# Altium PCB rectnew.PcbDoc
Units mm, origin at the board's own origin, x right, y up, seen from the top; angles counter-clockwise.
Board outline 127 x 101.6 mm, 2 copper layers (Top Layer, Bottom Layer); 9 components, 6 nets, 21 pads, 0 vias.
Unrouted connection lines stored in the file: 1.
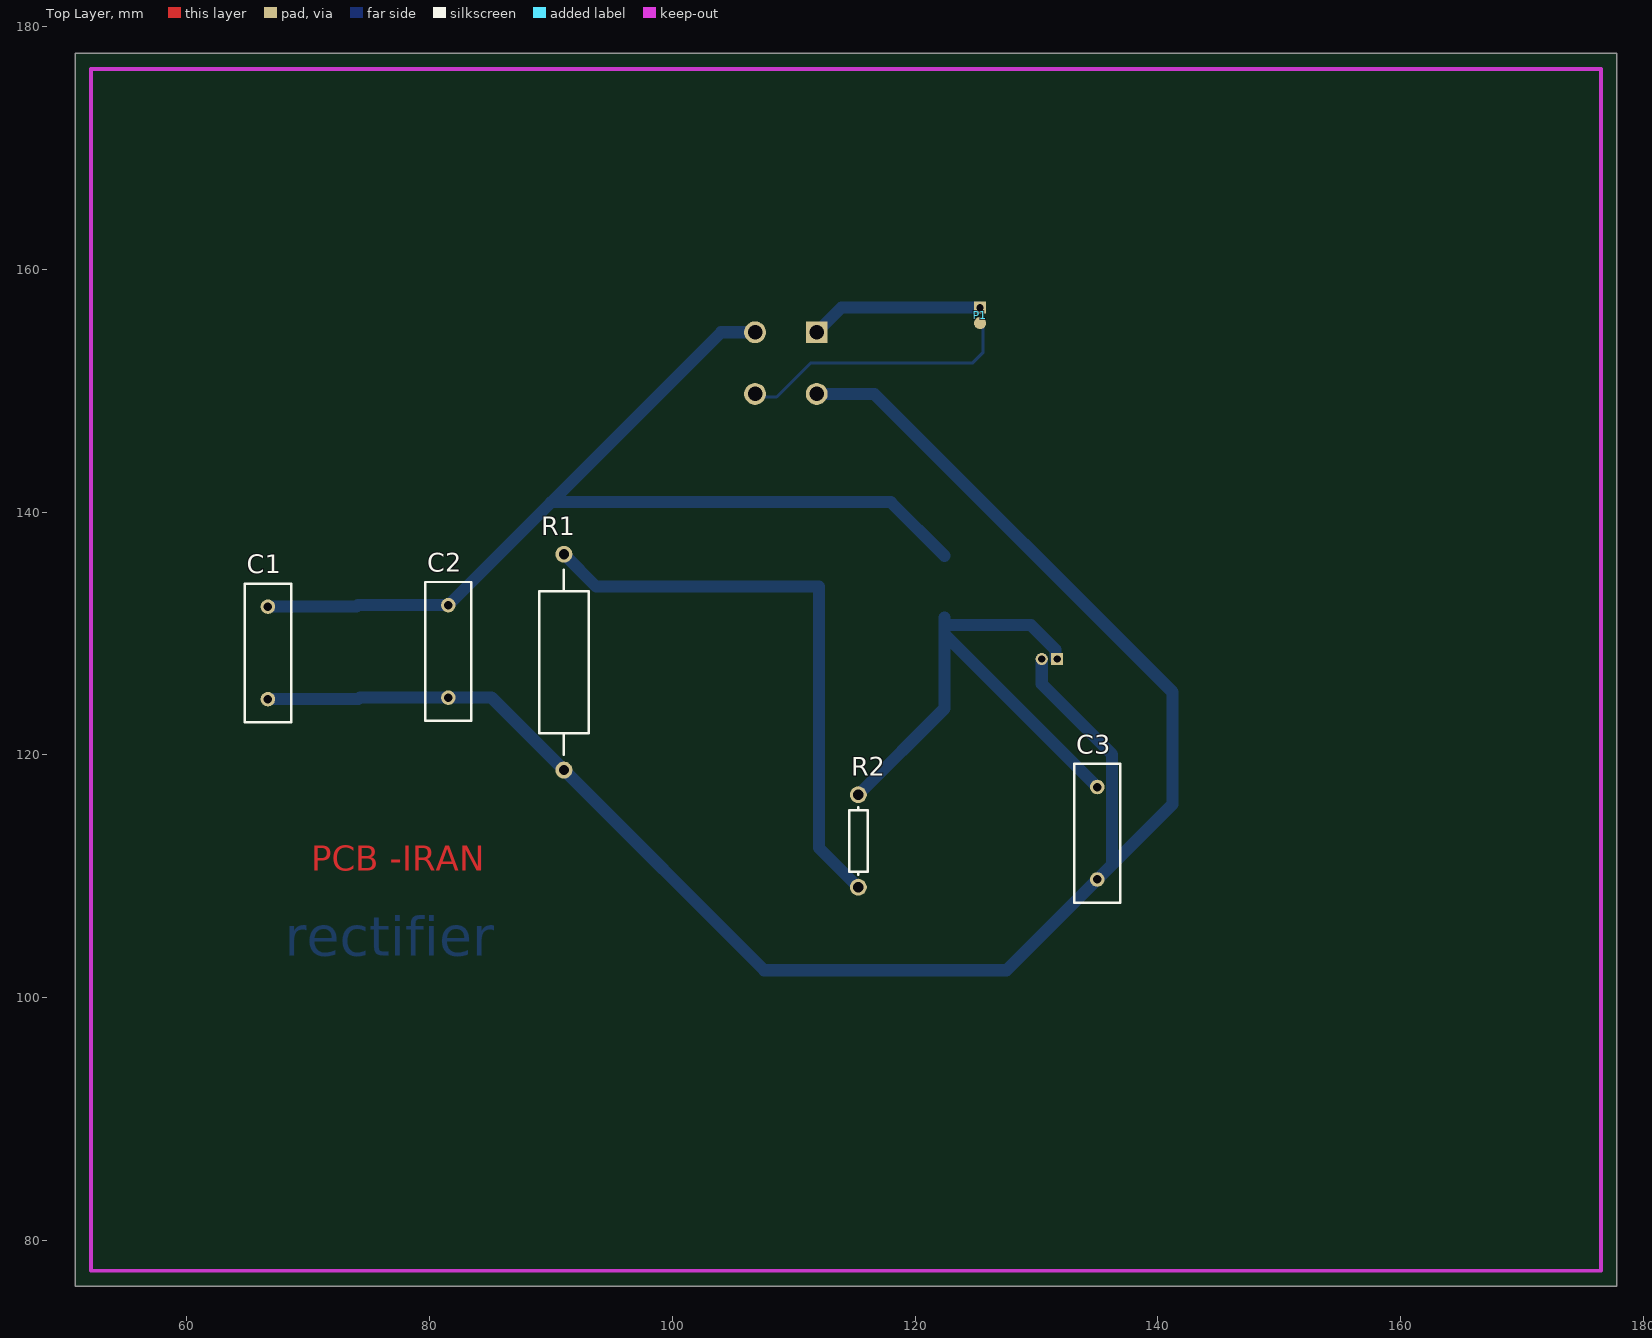
[diagram p0: Top Layer view]
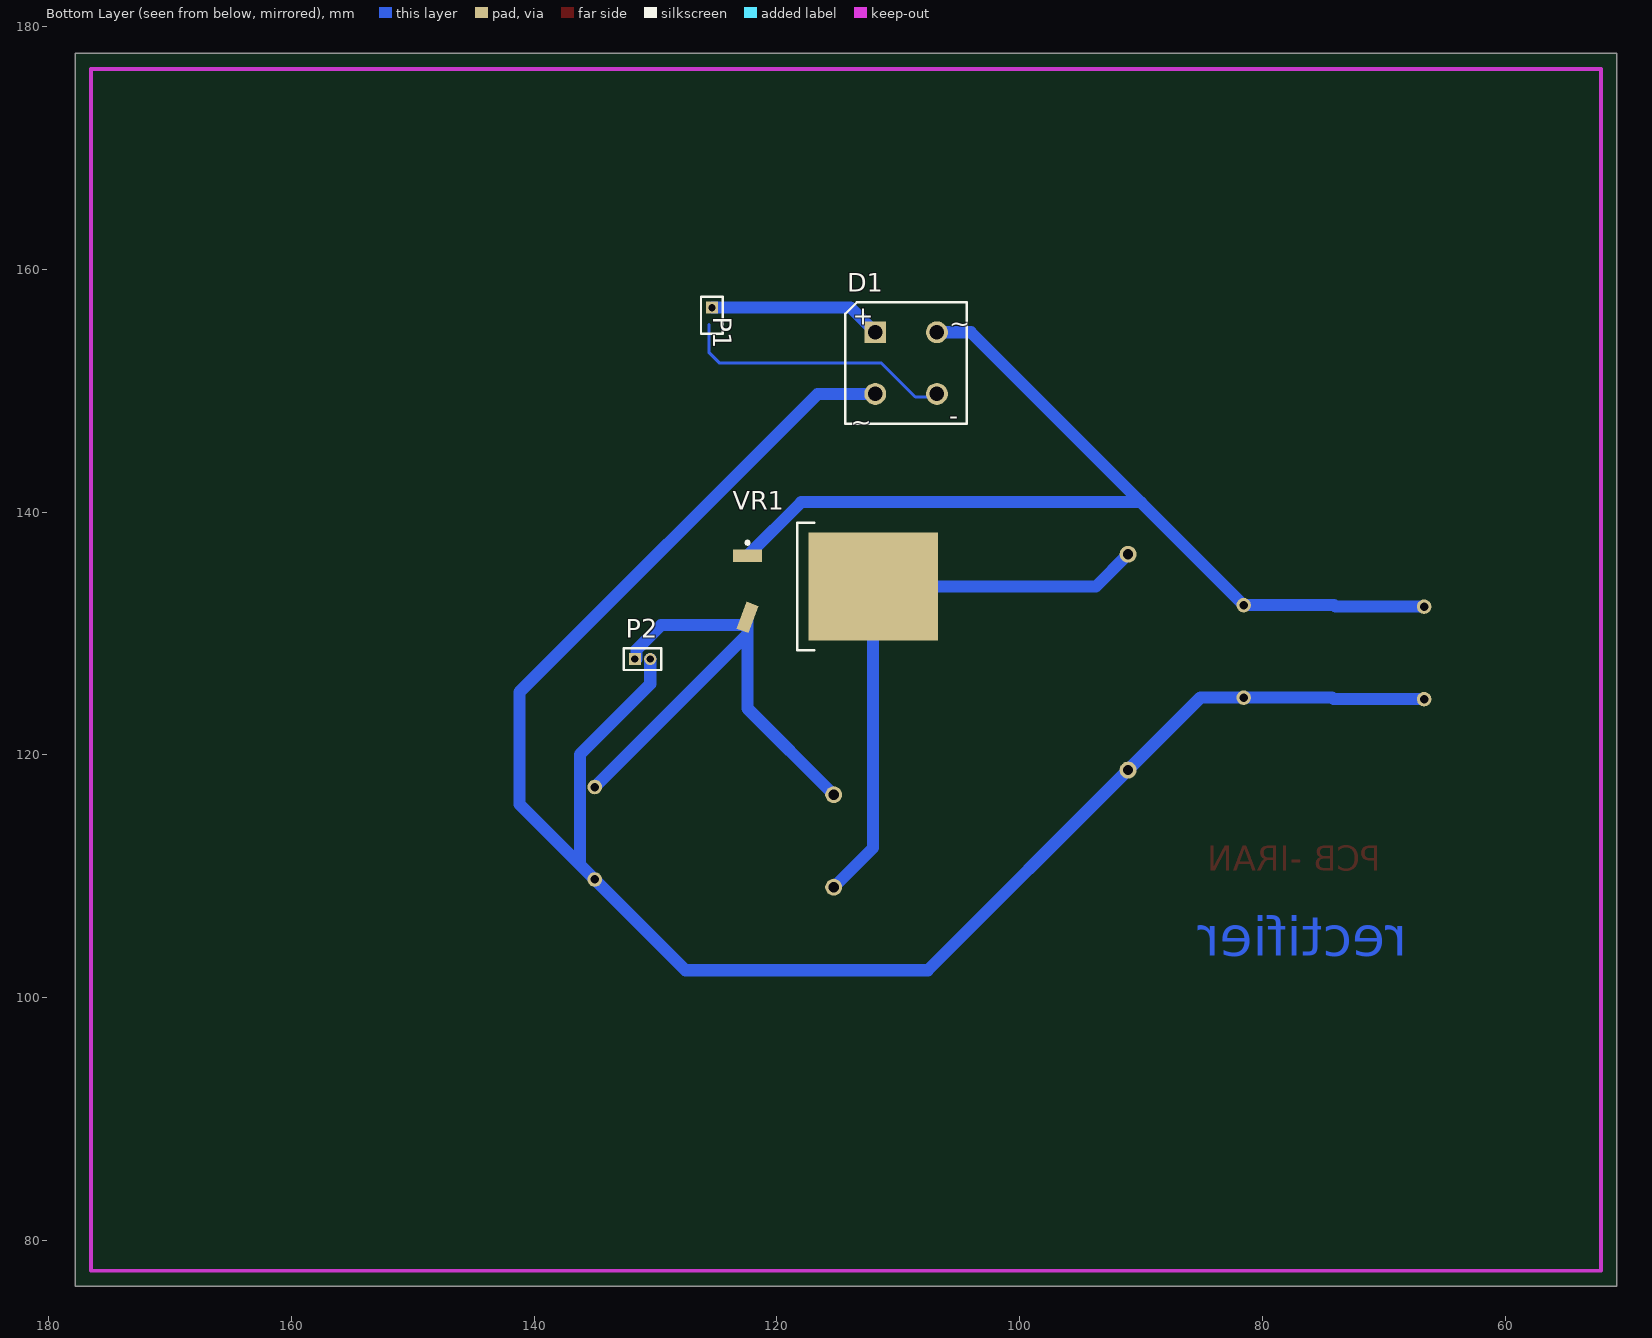
[diagram p1: Bottom Layer view, seen from below]

## Layer stack, top to bottom
Top Solder: solder mask 0.0102, Solder Resist, Dk 3.5
Top Layer: signal copper 0.0356
Dielectric 1: dielectric 0.32, FR-4, Dk 4.8
Bottom Layer: signal copper 0.0356
Bottom Solder: solder mask 0.0102, Solder Resist, Dk 3.5

## Board outline
50.8,76.2 177.8,76.2 177.8,177.8 50.8,177.8

## Design rules (kind name [scope] priority, off if disabled: settings)
Clearance [All] p1: gap=0.1
PolygonConnect [All] p1: connectstyle=Relief reliefconductorwidth=0.254 reliefentries=4 polygonreliefangle="90 Angle" airgapwidth=0.254
RoomDefinition rect [InComponentClass('rect')] p1: confinementstyle=ConfineIn formatcopy=TRUE lockcomponents=FALSE outline 76.708,124.46 134.62,124.46 134.62,146.812 76.708,146.812
RoutingLayers [All] p1: top layer_v5=FALSE bottom layer_v5=TRUE
RoutingVias [All] p1: holewidth=0.635 width=1.27 viastyle="Through Hole" minholewidth=0.711 minwidth=0.5 maxholewidth=0.711 maxwidth=2
SolderMaskExpansion [All] p1: expansion=0.102
Width [All] p1: maxlimit=3 minlimit=0.1 preferedwidth=1
29 further rules are at their usual default settings.

## Components (designator, comment, footprint, x,y, rotation, side; value= is the part's Value field where it differs from the comment)
C1 "Cap" RAD-0.3 66.675,128.397 r90 top
C2 "Cap" RAD-0.3 81.534,128.524 r90 top
C3 "Cap" RAD-0.3 135.001,113.538 r90 top
D1 "Bridge1" D-38 109.347,152.273 r180 bottom
P1 "MHDR1X2" MHDR1X2#1 125.349,156.845 r270 bottom
P2 "MHDR1X2" MHDR1X2#2 131.699,127.889 r180 bottom
R1 "Res Adj1" AXIAL-0.7 91.059,127.635 r90 top
R2 "Res1" AXIAL-0.3 115.316,112.903 r90 top
VR1 "Volt Reg" D2PAK_N 115.612,133.858 r180 bottom

## Footprints (in the part's own frame and the unit in brackets; to place one, negate y for a bottom-side part, rotate by r counter-clockwise, add the part's x,y. Pads: shape width x height; smd on the part's side, far side on the other; paste and mask are expansions set on the pad)
AXIAL-0.3 [mm] "Axial Device, Thru-Hole; 2 Leads; 0.3 in Pin Spacing"
  round 1.4 hole 0.85: 1(-3.81,0) 2(3.81,0)
  silkscreen extent -2.77,-0.76 2.77,0.76
AXIAL-0.7 [mm] "Axial Device, Thru-Hole; 2 Leads; 0.7 in Pin Spacing"
  round 1.4 hole 0.85: 1(-8.89,0) 2(8.89,0)
  silkscreen extent -7.62,-2.03 7.62,2.03
D2PAK_N [mm] "D2-PAK, 4-Leads, Body 8.8x10.4mm, Pitch 2.54mm, Lead Span 15.1mm, IPC Medium Density"
  rect 2.4x1.05 smd: 1(-6.8,2.54)
  rect 10.65x8.9 smd: 2(3.55,0)
  rect 1.05x2.4 smd rot 160: 3(-6.8,-2.54)
  silkscreen extent -6.93,-5.25 -1.3,5.25, body extent -2.7,-5.28 6.3,5.28, height 4.69
D-38 [mm] "Bridge Rectifier; 4 Terminals; Body 9.4 x 9.4 mm (typ); Pitch 5.08 mm"
  rect 1.8x1.8 hole 1.2: 1(-2.54,2.54)
  round 1.8 hole 1.2: 2(-2.54,-2.54) 3(2.54,-2.54) 4(2.54,2.54)
  silkscreen extent -5,-5 5,5, body extent -5,-5 5,5, height 9.91
MHDR1X2#1 [mm] "Connector; Header; 2 Position"
  rect 1x1 hole 0.6: 1(0,0)
  round 1 smd far side: 2(1.27,0)
  silkscreen extent -0.9,-0.9 2.17,0.9
MHDR1X2#2 [mm] "Connector; Header; 2 Position"
  rect 1x1 hole 0.6: 1(0,0)
  round 1 hole 0.6: 2(1.27,0)
  silkscreen extent -0.9,-0.9 2.17,0.9
RAD-0.3 [mm] "Radial Cap, Thru-Hole; 2 Leads; 0.3 in Pin Spacing"
  round 1.2 hole 0.7: 1(-3.81,0) 2(3.81,0)
  silkscreen extent -5.71,-1.91 5.71,1.91

## Part data
C1 C2 C3: "Capacitor"
D1: "Full Wave Diode Bridge"
P1 P2: "Header, 2-Pin"
R1: "Variable Resistor"
R2: "Resistor"
VR1: "Voltage Regulator"

## Nets (pads, with @x,y where several pads share a name; then routed paths per layer and width w, separated by ;. In a path a pad name is that pad's centre, name@x,y a point inside that pad or via, vN(x,y) a via of type N, cw(c..) or ccw(c..) an arc to the next point about the centre after c; other vN are vias at no path point)
NetC1_1: C1.1 C2.1 C3.1 D1.2 P2.2 R1.1 | length 157.6
  Bottom Layer w1: C1.1 74.117,124.587 74.244,124.714 C2.1 85.09,124.714 R1.1 107.556,102.248 127.521,102.248 C3.1 136.22,110.947 ; D1.2 116.637,149.733 141.199,125.171 141.199,115.926 136.22,110.947 ; P2.2 130.429,125.832 136.22,120.04 136.22,110.947
NetC1_2: C1.2 C2.2 D1.4 VR1.1 | length 83.7
  Bottom Layer w1: C1.2 73.965,132.207 74.092,132.334 C2.2 90.018,140.818 ; D1.4 104.013,154.813 90.018,140.818 ; VR1.1 117.992,140.818 90.018,140.818
NetC3_2: C3.2 P2.1 R2.2 VR1.3 | length 46.3
  Bottom Layer w1: R2.2 122.412,123.809 122.412,129.937 ; VR1.3 VR1.3@122.412,130.683 ; P2.1 131.547,127.889 131.547,128.676 129.54,130.683 VR1.3@122.412,130.683 ; C3.2 122.412,129.937 ; 122.412,129.937 VR1.3@122.412,130.683
NetD1_1: D1.1 P1.1 | length 14.3
  Bottom Layer w1: D1.1 113.919,156.845 P1.1
NetD1_3: D1.3 P1.2
NetR1_2: R1.2 R2.1 VR1.2 | length 48.2
  Bottom Layer w1: R1.2 93.726,133.858 VR1.2 112.062,112.347 R2.1
copper on no net: | length 23.2
  Bottom Layer w0.254: 106.807,150.114 106.807,149.479 108.585,149.479 111.379,152.273 124.714,152.273 125.603,153.162 125.603,155.448

## Keep-outs
Keep-Out Layer:
  lines w0.3: 52.1,77.5 52.1,176.5 176.5,176.5 176.5,77.5 52.1,77.5

## Other copper
Top Layer:
  text "PCB -IRAN" at 70.231,109.728 h3.5
Bottom Layer:
  text "rectifier" at 68.072,102.362 h5.52

## Silkscreen, mask and mechanical layers (free items; w line width, h text height)
Drill Drawing:
  text ".LEGEND" at 80.645,128.016 h1.52
  text "Drill Drawing." at 80.645,125.476 h1.52

## Dimensions
52.1,77.5 to 52.1,176.5 on Mechanical 1
52.1,77.5 to 176.5,77.5 on Mechanical 1

## Text inside footprints (layer, text, board x,y; h text height)
D1: Bottom Overlay "+" at 113.757,155.437 h1.5; Bottom Overlay "-" at 105.791,147.193 h1.5; Bottom Overlay "~" at 113.919,146.685 h1.5; Bottom Overlay "~" at 105.791,154.813 h1.5